# Altium PCB PCB1.PcbDoc (part 2 of 2)
Units mil, origin at the board's own origin, x right, y up, seen from the top; angles counter-clockwise.
Board outline 2312.99 x 1968.58 mil, 4 copper layers (Top Layer, MidLayer1, MidLayer2, Bottom Layer); 130 components, 134 nets, 621 pads, 156 vias.
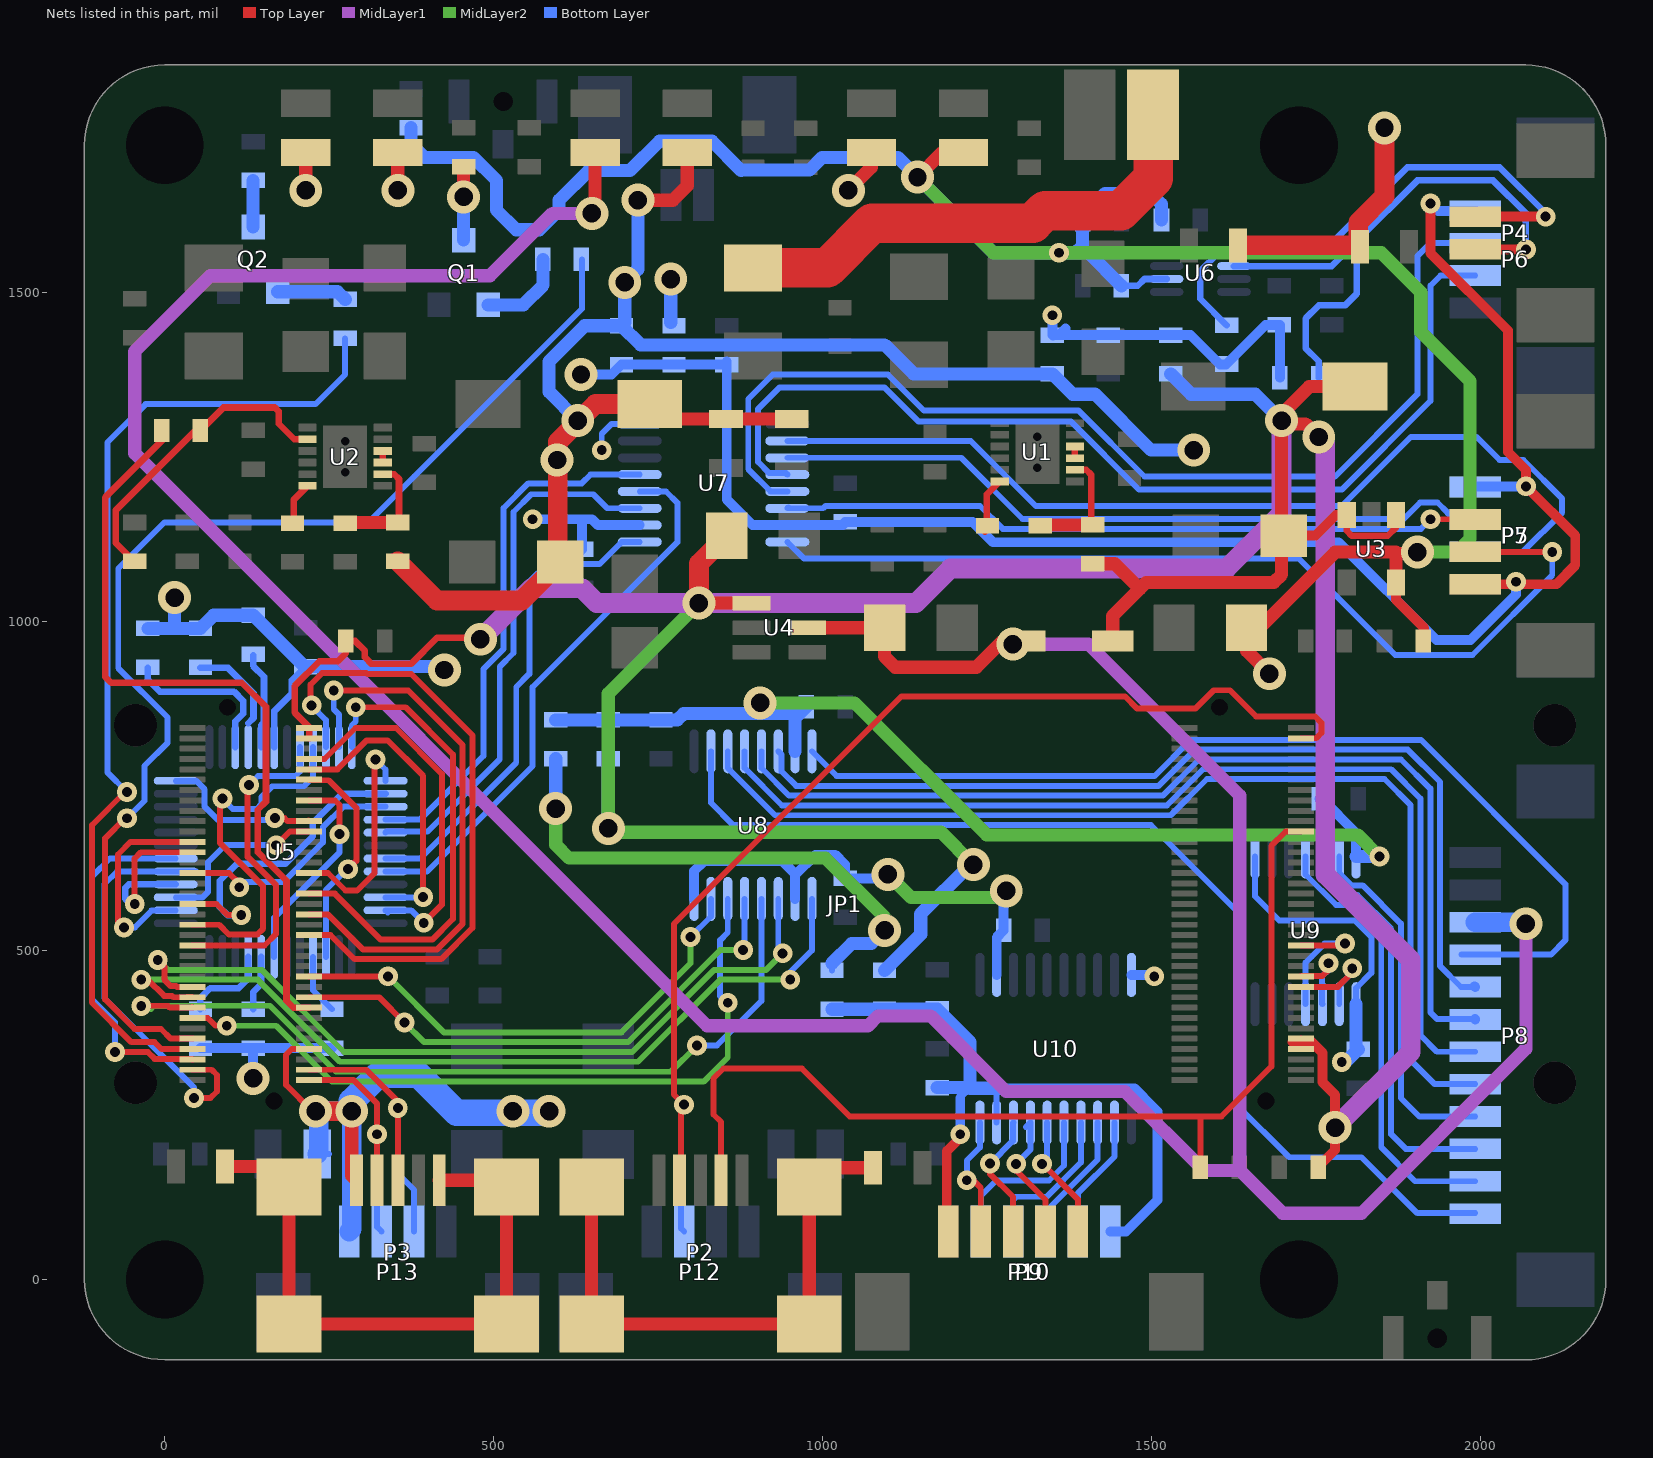
[diagram p4: the nets of this part, all layers, seen from the top]

## Via types
v1: diameter 50, hole 28, Top Layer to Bottom Layer, 78 vias
v2: diameter 30, hole 15, Top Layer to Bottom Layer, 78 vias

## Nets (pads, with @x,y where several pads share a name; then routed paths per layer and width w, separated by ;. In a path a pad name is that pad's centre, name@x,y a point inside that pad or via, vN(x,y) a via of type N, cw(c..) or ccw(c..) an arc to the next point about the centre after c; other vN are vias at no path point) (continued)
NetJP1_37: JP1.37 P2.2 P12.3 | length 1804.1
  Top Layer w9: P2.2@782.84,150.83 784.74,152.73 v2@784.74,265.83 ; v2(789.33,265.83) 773.93,281.23 773.93,540.42 1119.74,886.23 1460.07,886.23 1477.92,868.38 1567.21,868.38 1594.65,895.83 1619.33,895.83 1659.24,855.92 1748.79,855.92 1758.36,846.36 1758.36,830.73 1750.42,822.8 JP1.37@1727.24,822.8
  Bottom Layer w9: v2@784.74,261.23 784.74,77.86 P12.3@789.72,72.87
NetJP1_37_: JP1.37_ U5.29 | length 633.6
  Top Layer w9: JP1.37_@42.2,318.86 71.3,318.86 79.33,310.83 79.33,285.83 69.33,275.83 v2(44.33,275.83)
  Bottom Layer w9: v2(44.33,275.83) 44.33,292.16 -91.46,427.95 -91.46,601.22 -72.32,620.35 U5.29@16.73,620.35 U5.29@47.94,620.35
NetJP1_38_: JP1.38_ U5.30 | length 542.1
  Top Layer w9: v2(-75.67,345.83) -25.67,345.83 -15.26,335.42 41.39,335.42 JP1.38_@42.2,334.61
  Bottom Layer w9: v2(-75.67,345.83) -75.67,391.08 -110.16,425.57 -110.16,613.03 -83.15,640.04 U5.30@16.73,640.04
NetJP1_39_: JP1.39_ R30.2 | length 1528.5
  Top Layer w9: v2@-58.84,742.66 -110.67,690.83 -110.67,420.83 -50.67,360.83 -15.67,360.83 -5.2,350.35 JP1.39_@42.2,350.35
  Bottom Layer w9: v2(-57.32,741.14) -87.3,771.11 -87.3,1272.45 -29.02,1330.73 229.24,1330.73 274.33,1375.83 R30.2@274.33,1430.83
NetJP1_40_: JP1.40_ R27.2 | length 1827.5
  Top Layer w9: v2@-58.84,702.66 -90.67,670.83 -90.67,425.83 -45.67,380.83 -5.67,380.83 9.06,366.1 JP1.40_@42.2,366.1
  Bottom Layer w9: v2(-57.32,701.14) -30.67,727.8 -30.67,780.83 4.33,815.83 4.33,854.39 -70.67,929.39 -70.67,1080.83 -0.67,1150.83 309.33,1150.83 634.33,1475.83 R27.2@634.33,1550.83
NetJP1_42_: JP1.42_ U8.6 | length 1119.1
  Top Layer w9: JP1.42_@42.2,397.6 65.39,397.6 77.16,385.83 v2(94.33,385.83)
  MidLayer2 w9: v2(94.33,385.83) 169.33,385.83 254.33,300.83 819.33,300.83 855.95,337.44 v2(855.95,420.83)
  Bottom Layer w9: v2@854.33,420.83 844.33,430.83 844.33,515.83 855.95,527.44 U8.6@855.95,578.62
NetJP1_43_: JP1.43_ U8.4 | length 1266.9
  Top Layer w9: v2@-33.19,413.35 -30.3,416.23 4.85,416.23 7.74,413.35 JP1.43_@42.2,413.35 JP1.43_@41.39,414.16
  MidLayer2 w9: v2(-35.67,415.83) -31.07,411.23 -21.19,411.23 -16.19,416.23 160.01,416.23 260.41,315.83 769.33,315.83 v2(809.33,355.83)
  Bottom Layer w9: v2(809.33,355.83) 839.33,355.83 907.13,423.62 U8.4@907.13,578.62
NetJP1_44_: JP1.44_ U8.1 | length 1323.9
  Top Layer w9: v2(-35.67,455.83) -25.67,455.83 -0.98,431.14 11.03,431.14 13.07,429.09 JP1.44_@42.2,429.09 41.39,429.91 JP1.44_@34.07,429.91
  MidLayer2 w9: v2(-35.67,455.83) 141.49,455.83 266.3,331.02 719.52,331.02 844.33,455.83 v2(950.95,455.83)
  Bottom Layer w9: v2(950.95,455.83) 950.95,467.44 983.9,500.39 U8.1@983.9,578.62
NetJP1_45_: JP1.45_ U8.3 | length 1237.1
  Top Layer w9: v2(-10.67,485.83) -0.67,475.83 -0.67,455.83 9.11,446.04 17.2,446.04 18.4,444.84 JP1.45_@42.2,444.84
  MidLayer2 w9: v2(-10.67,485.83) 4.43,470.73 147.66,470.73 272.48,345.92 710.51,345.92 835.41,470.83 914.33,470.83 v2(939.33,495.83)
  Bottom Layer w9: U8.3@932.72,578.62 932.72,502.44 v2(939.33,495.83)
NetJP1_46: JP1.46 P2.4 R54.1 | length 1542.1
  Top Layer w9: P2.4@845.83,150.83 845.83,239.33 834.33,250.83 834.33,305.83 849.33,320.83 968.46,320.83 1041.42,247.87 1574.33,247.87 ; R54.1@1574.33,170.83 1574.33,247.87 ; JP1.46@1727.24,681.06 1704.06,681.06 1682.25,659.25 1682.25,323.74 1606.38,247.87 1574.33,247.87
NetJP1_49_: JP1.49_ U5.44 | length 502.7
  Top Layer w9: JP1.49_@42.2,507.83 151.77,507.83 169.37,525.43 169.37,599.25 126.09,642.53 126.09,749.87 v2(128.03,751.81)
  Bottom Layer w9: v2(128.03,751.81) 141.68,765.46 198.77,765.46 205.71,772.4 U5.44@205.71,809.33
NetJP1_51_: JP1.51_ U5.45 | length 561
  Top Layer w9: JP1.51_@42.2,539.33 82.64,539.33 97.52,524.45 140.83,524.45 149.69,533.31 149.69,597.86 83.74,663.8 83.74,728.19 86.69,731.14 v2(87.68,731.14)
  Bottom Layer w9: v2(87.68,731.14) 103.43,715.39 139.84,715.39 146.73,722.28 146.73,733.11 163.46,749.84 211.69,749.84 225.39,763.54 U5.45@225.39,809.33
NetJP1_53_: JP1.53_ U5.2 | length 477.3
  Top Layer w9: JP1.53_@42.2,570.83 78.7,570.83 95.55,553.98 v2(116.22,553.98)
  Bottom Layer w10: v2(116.22,553.98) 95.55,553.98 83.74,565.79 83.74,606.14 109.33,631.73 183.15,631.73 225.02,673.6 225.02,693.91 269.57,738.46 U5.2@335.63,738.46
NetJP1_56_: JP1.56_ U5.3 | length 370.2
  Top Layer w9: JP1.56_@42.2,618.07 97.4,618.07 113.27,602.2 v2(113.27,596.3)
  Bottom Layer w9: v2(113.27,596.3) 121.14,604.17 180.2,604.17 240.42,664.4 240.42,687.53 271.67,718.78 U5.3@335.63,718.78
NetJP1_57: JP1.57 U9.4 | length 203.5
  Top Layer w9: JP1.57@1727.24,507.83 1791.34,507.83 v2(1794.33,510.83)
  Bottom Layer w9: U9.4@1734.33,418.62 1734.33,481.76 1763.4,510.83 v2(1794.33,510.83)
NetJP1_58_: JP1.58_ U5.28 | length 274.2
  Top Layer w9: v2(-45.67,570.83) -45.67,640.12 -36.22,649.57 JP1.58_@42.2,649.57
  Bottom Layer w10: v2(-45.67,570.83) -52.2,570.83 -59.96,578.58 -59.96,595.32 -54.61,600.67 U5.28@16.73,600.67
NetJP1_59_: JP1.59_ U5.26 | length 325.9
  Top Layer w9: v2(-61.93,535.28) -71.07,544.42 -71.07,646.21 -51.97,665.32 JP1.59_@42.2,665.32
  Bottom Layer w9: v2(-61.93,535.28) -45.29,535.28 -20.26,560.3 -20.26,561.23 -20.2,561.3 U5.26@16.73,561.3
NetJP1_60: JP1.60 U9.3 | length 122.9
  Top Layer w9: JP1.60@1727.24,460.59 1728.06,461.41 1759.91,461.41 1769.33,470.83 v2(1769.33,480.83)
  Bottom Layer w9: U9.3@1759.92,418.62 1759.33,419.21 1759.33,460.83 1769.33,470.83 v2(1769.33,480.83)
NetJP1_61: JP1.61 U9.2 | length 155.9
  Top Layer w9: JP1.61@1727.24,444.84 1783.35,444.84 1805.24,466.73 v2(1805.24,472.99)
  Bottom Layer w9: U9.2@1785.51,418.62 1785.51,447.01 1805.24,466.73 v2(1805.24,472.99)
NetJP1__4: JP1._4 U5.11 | length 559.1
  Top Layer w9: JP1._4@219.37,791.3 242.75,791.3 289.88,838.43 351.46,838.43 421.34,768.54 421.34,569.72 v2(393.78,542.17)
  Bottom Layer w9: U5.11@339,557.93 U5.11@335.63,561.3 374.65,561.3 v2(393.78,542.17)
NetJP1__5: JP1._5 U5.10 | length 455.6
  Top Layer w9: JP1._5@219.37,775.55 262.76,775.55 306.93,819.72 338.66,819.72 392.8,765.59 v2(392.8,581.54)
  Bottom Layer w9: U5.10@335.63,580.98 392.24,580.98 v2(392.8,581.54)
NetJP1__6: JP1._6 U5.15 | length 336.4
  Top Layer w9: JP1._6@219.37,759.8 220.19,758.99 249.22,758.99 291.23,716.97 291.23,636.47 v2(278.62,623.86)
  Bottom Layer w9: U5.15@245.08,490.43 245.08,592.28 276.65,623.86 v2(278.62,623.86)
NetJP1__8: JP1._8 U5.19 | length 321.4
  Top Layer w9: JP1._8@219.37,728.31 258.82,728.31 265.83,721.3 v2(265.83,677.01)
  Bottom Layer w9: U5.19@166.34,490.43 166.34,549.96 265.83,649.45 v2(265.83,677.01)
NetJP1__10: JP1._10 U5.36 | length 247.4
  Top Layer w9: v2(167.4,701.61) 182.17,701.61 186.97,696.81 JP1._10@219.37,696.81 JP1._10@218.56,697.63
  Bottom Layer w9: U5.36@16.73,758.15 47.67,758.15 60.6,745.22 60.6,718.85 81.2,698.25 164.04,698.25 v2(167.4,701.61)
NetJP1__11: JP1._11 U5.27 | length 270.6
  Top Layer w9: v2(169.37,660.28) 190.16,681.06 JP1._11@219.37,681.06
  Bottom Layer w9: U5.27@16.73,580.98 57.6,580.98 66.02,589.41 66.02,634.69 91.61,660.28 v2(169.37,660.28)
NetJP1__15: JP1._15 U5.1 | length 338.2
  Top Layer w9: JP1._15@219.37,618.07 248.17,618.07 274.86,591.38 292.52,591.38 318.98,617.83 v2@318.98,790.59 ; v2@319.96,788.23 320.43,788.7 v2(320.43,790.59)
  Bottom Layer w9: v2@319.96,788.23 320.43,788.7 v2(320.43,790.59) 335.63,775.39 U5.1@335.63,758.15
NetJP1__17: JP1._17 U5.48 | length 751.1
  Top Layer w9: JP1._17@219.37,586.57 258.58,586.57 328.4,516.76 406.76,516.76 438.07,548.07 438.07,798.07 366.22,869.92 v2(290.43,869.92)
  Bottom Layer w9: U5.48@284.45,809.33 284.45,842.28 290.43,848.27 v2(290.43,869.92)
NetJP1__19: JP1._19 U5.47 | length 863.4
  Top Layer w9: JP1._19@219.37,555.08 247.99,555.08 301.22,501.85 414.08,501.85 452.98,540.75 452.98,812.69 370.16,895.51 v2(256.97,895.51)
  Bottom Layer w9: v2(256.97,895.51) 256.97,866.97 264.76,859.17 U5.47@264.76,809.33
NetJP1__21: JP1._21 U5.46 | length 974.3
  Top Layer w9: JP1._21@219.37,523.58 251.93,523.58 288.56,486.95 420.26,486.95 467.88,534.57 467.88,827.32 374.78,920.42 307.95,920.42 306.28,922.09 239.25,922.09 221.54,904.37 221.54,873.86 222.57,872.83 v2(223.33,872.83)
  Bottom Layer w9: v2(223.33,872.83) 223.33,872.06 245.08,850.32 U5.46@245.08,809.33
NetJP1__25: JP1._25 U8.7 | length 769.4
  Top Layer w9: JP1._25@219.37,460.59 339.09,460.59 v2(339.33,460.83)
  MidLayer2 w9: v2(339.33,460.83) 424.33,375.83 694.33,375.83 799.33,480.83 v2(799.33,520.83)
  Bottom Layer w9: v2(799.33,520.83) 830.35,551.85 U8.7@830.35,578.62
NetJP1__27: JP1._27 U8.5 | length 824
  Top Layer w9: JP1._27@219.37,429.09 326.06,429.09 v2(364.33,390.83)
  MidLayer2 w9: v2(364.33,390.83) 394.33,360.83 704.33,360.83 844.33,500.83 v2(879.33,500.83)
  Bottom Layer w9: v2@881.54,500.83 U8.5@881.54,578.62
NetJP1__28: JP1._28 R6.2 | length 1182.3
  Top Layer w10: R6.2@-4.72,1290.83 -4.72,1274.57 -90.67,1188.62 -90.67,916.38 -81.61,907.32 117.2,907.32 153.94,870.59 153.94,741.08 153.93,731.69 153.94,726.54 141.5,714.09 141.5,649.76 185.12,606.14 185.12,423.71 195.48,413.35 JP1._28@219.37,413.35
NetJP1__34: JP1._34 P3.3 P13.2 | length 473
  Top Layer w9: JP1._34@219.37,318.86 306.3,318.86 354.33,270.83 P3.3@354.33,150.83
  Bottom Layer w9: v2(354.33,260.83) 354.33,160.83 378.94,136.22 P13.2@378.94,72.87
NetJP1__35: JP1._35 P3.2 P13.3 | length 385.6
  Top Layer w9: JP1._35@219.37,303.11 287.12,303.11 322.84,267.39 v2(322.84,220.83) P3.2@322.84,150.83
  Bottom Layer w9: v2(322.84,220.83) 322.84,79.76 P13.3@329.72,72.87
NetL3_1: L3.1 P2.6 | length 857.2
  Top Layer w20: P2.6@648.98,140.98 P2.6@648.98,-67.68 P2.6@979.69,-67.68 P2.6@979.69,140.98 1008.54,169.84 L3.1@1076.93,169.84
NetL4_1: L4.1 P3.5 P3.6 | length 964.5
  Top Layer w9: P3.6@509.84,150.83 P3.6@519.69,140.98
  Top Layer w20: L4.1@91.73,171.81 158.15,171.81 P3.6@188.98,140.98 P3.6@188.98,-67.68 P3.6@519.69,-67.68 P3.6@519.69,140.98 ; P3.5@417.32,150.83 P3.6@509.84,150.83
NetP4_1: P4.1 R39.1 U6.6 | length 922
  Top Layer w15: P4.1@1992.28,1566.22 1992.68,1565.83 v2(2069.33,1565.83)
  Bottom Layer w10: U6.6@1625.51,1540.67 1774.17,1540.67 1811.83,1578.33 ; R39.1@1754.33,1370.83 1754.33,1395.83 1734.33,1415.83 1734.33,1460.83 1754.33,1480.83 1794.33,1480.83 1811.83,1498.33 1811.83,1578.33 ; v2(2069.33,1565.83) 2069.33,1620.83 2019.33,1670.83 1904.33,1670.83 1811.83,1578.33
NetP4_2: P4.2 R40.1 U6.5 | length 830.7
  Top Layer w15: P4.2@1992.28,1615.43 1992.68,1615.83 v2(2099.33,1615.83)
  Bottom Layer w10: R40.1@1614.33,1450.83 1574.33,1490.83 1574.33,1532.95 1602.21,1560.83 1625.04,1560.83 U6.5@1625.51,1560.35 1758.86,1560.35 1889.33,1690.83 2029.33,1690.83 2099.33,1620.83 v2(2099.33,1615.83)
NetP5_2: P5.2 U7.16 | length 1436.4
  Top Layer w9: P5.2@1992.28,1106.22 2108.94,1106.22 v2(2109.33,1105.83)
  Bottom Layer w9: U7.16@946.54,1121.26 971.97,1095.83 1724.33,1095.83 1870.64,949.52 1988.02,949.52 2109.33,1070.83 v2(2109.33,1105.83)
NetP5_3: P5.3 U7.14 | length 1069.9
  Top Layer w9: v2(1924.33,1155.83) 1991.89,1155.83 P5.3@1992.28,1155.43
  Bottom Layer w9: U7.14@948.08,1173.99 U7.14@946.54,1172.44 1000.95,1172.44 1004.33,1175.83 1239.33,1175.83 1273.93,1141.23 1909.74,1141.23 v2(1924.33,1155.83)
NetP6_2: P6.2 U7.13 | length 1634.8
  Bottom Layer w9: U7.13@946.54,1198.03 921.09,1198.03 887.13,1232 887.13,1338.62 924.33,1375.83 1099.33,1375.83 1154.33,1320.83 1389.33,1320.83 1489.33,1220.83 1727.87,1220.83 1779.33,1220.83 1904.33,1345.83 1904.33,1555.83 1923.94,1575.43 P6.2@1992.28,1575.43
NetP6_3: P6.3 U7.12 | length 1538.4
  Bottom Layer w9: U7.12@946.54,1223.62 944.33,1225.83 918.89,1225.83 902.03,1242.68 902.03,1323.53 934.33,1355.83 1094.33,1355.83 1145.62,1304.54 1377.32,1304.54 1481.03,1200.83 1789.33,1200.83 1924.33,1335.83 1924.33,1510.83 1939.72,1526.22 P6.3@1992.28,1526.22
NetP7_2: P7.2 U7.11 | length 1105.9
  Bottom Layer w9: U7.11@946.54,1249.21 1210.95,1249.21 1304.02,1156.14 1883.49,1156.14 1908.59,1181.23 1934.85,1181.23 1949.74,1166.35 1949.74,1165.49 1959.79,1155.43 P7.2@1992.28,1155.43
NetP7_3: P7.3 U7.10 | length 1479.1
  Bottom Layer w9: U7.10@946.54,1274.8 1225.35,1274.8 1324.33,1175.83 1789.33,1175.83 1894.33,1280.83 1994.33,1280.83 2029.33,1245.83 2065.58,1245.83 2124.33,1187.08 2124.33,1165.83 2064.72,1106.22 P7.3@1992.28,1106.22
NetP8_4: P8.4 U8.16 | length 1526.6
  Bottom Layer w9: U8.16@983.9,803.03 1021.51,765.42 1504.85,765.42 1559.88,820.45 1909.78,820.45 2129.33,600.9 2129.33,515.83 2107.36,493.86 P8.4@1992.28,493.86 P8.4@1971.66,493.86
NetP8_5: P8.5 U8.14 | length 1434.2
  Bottom Layer w9: U8.14@932.72,803.03 937.9,797.85 937.9,772.4 959.79,750.52 1511.03,750.52 1566.06,805.54 1889.61,805.54 1938.86,756.3 1938.86,476.3 1970.51,444.65 P8.5@1992.28,444.65
  Bottom Layer w15: P8.5@1991.1,445.83 P8.5@1992.28,444.65
NetP8_6: P8.6 U8.13 | length 1513.6
  Bottom Layer w9: U8.13@907.13,803.03 907.13,777.59 949.1,735.61 1517.2,735.61 1572.23,790.64 1879.52,790.64 1923.95,746.2 1923.95,406.2 1934.33,395.83 P8.6@1991.89,395.83
  Bottom Layer w15: P8.6@1991.89,395.83 P8.6@1992.28,395.43
NetP8_7: P8.7 U8.12 | length 1571.3
  Bottom Layer w9: U8.12@881.54,803.03 881.54,777.59 938.42,720.7 1523.38,720.7 1578.4,775.73 1864.43,775.73 1909.05,731.11 1909.05,371.11 1933.94,346.22 P8.7@1992.28,346.22
NetP8_8: P8.8 U8.11 | length 1633.5
  Bottom Layer w9: U8.11@855.95,803.03 855.95,777.59 927.73,705.8 1529.55,705.8 1584.58,760.83 1854.33,760.83 1894.14,721.02 1894.14,333.38 1930.51,297.01 P8.8@1992.28,297.01
NetP8_9: P8.9 U9.13 | length 540.6
  Bottom Layer w9: U9.13@1785.51,643.03 1785.51,617.59 1803.94,599.16 1821,599.16 1879.24,540.92 1879.24,275.92 1907.36,247.8 P8.9@1992.28,247.8
NetP8_10: P8.10 U9.12 | length 614.2
  Bottom Layer w9: U9.12@1759.92,643.03 1759.92,617.59 1793.25,584.26 1813.06,584.26 1864.33,532.99 1864.33,220.83 1886.58,198.58 P8.10@1992.28,198.58
NetP8_11: P8.11 U9.11 | length 669.4
  Bottom Layer w9: U9.11@1734.33,643.03 1734.33,615.83 1780.81,569.35 1806.89,569.35 1849.33,526.91 1849.33,200.83 1900.79,149.37 P8.11@1992.28,149.37
NetP8_12: P8.12 U8.10 | length 1671.5
  Bottom Layer w9: U8.10@830.35,803.03 830.35,724.8 864.33,690.83 1499.33,690.83 1629.33,560.83 1629.33,265.76 1709.26,185.83 1819.33,185.83 1904.33,100.83 P8.12@1992.28,100.83
NetP9_2: P9.2 U10.20 | length 188.6
  Top Layer w9: v2(1219.33,150.83) 1229.33,150.83 1240.51,139.65 P9.2@1240.51,72.87
  Bottom Layer w9: v2(1219.33,150.83) 1219.33,180.83 1239.17,200.67 U10.20@1239.17,238.62
NetP9_3: P9.3 U10.18 | length 195.3
  Top Layer w9: v2(1254.72,176.22) 1254.33,175.83 1254.33,160.83 1289.72,125.43 P9.3@1289.72,72.87
  Bottom Layer w9: v2(1254.72,176.22) 1289.33,210.83 1289.33,237.6 U10.18@1290.35,238.62
NetP9_4: P9.4 U10.17 | length 203.1
  Top Layer w9: v2(1294.33,175.83) 1294.33,165.83 1338.94,121.22 P9.4@1338.94,72.87
  Bottom Layer w9: v2(1294.33,175.83) 1315.95,197.44 U10.17@1315.95,238.62 1308.93,231.6
NetP9_5: P9.5 U10.16 | length 192.3
  Top Layer w9: v2(1333.71,175.83) 1334.33,175.83 1388.15,122.01 P9.5@1388.15,72.87
  Bottom Layer w9: v2(1333.71,175.83) 1334.33,175.83 1341.54,183.03 U10.16@1341.54,238.62
NetP10_2: P10.2 U10.12 | length 214.3
  Bottom Layer w9: P10.2@1388.15,72.87 1388.15,131.1 1443.9,186.85 U10.12@1443.9,238.62 U10.12@1443.9,213.18
NetP10_3: P10.3 U10.13 | length 198.6
  Bottom Layer w9: P10.3@1338.94,72.87 1338.94,102.97 1418.31,182.34 U10.13@1418.31,238.62
NetP10_4: P10.4 U10.14 | length 235.6
  Bottom Layer w9: P10.4@1289.72,72.87 1289.72,121.22 1294.33,125.83 1340.72,125.83 1392.72,177.83 U10.14@1392.72,238.62
NetP10_5: P10.5 U10.15 | length 265.2
  Bottom Layer w9: P10.5@1240.51,72.87 1240.51,127.01 1263.93,150.42 1344.23,150.42 1367.13,173.32 U10.15@1367.13,238.62
NetQ1_1: Q1.1 R27.1 | length 135.1
  Bottom Layer w20: Q1.1@491.73,1481.61 545.12,1481.61 575.28,1511.77 R27.1@575.28,1550.83
NetQ1_3: Q1.3 R26.2 | length 110.8
  Top Layer w20: v1(454.33,1645.83) R26.2@454.33,1690.83
  Bottom Layer w20: Q1.3@454.33,1580.04 v1(454.33,1645.83)
NetQ2_1: Q2.1 R30.1 | length 107.5
  Bottom Layer w20: Q2.1@171.73,1501.61 262.6,1501.61 R30.1@274.33,1489.88
NetQ2_3: Q2.3 R28.2 | length 70.8
  Bottom Layer w20: Q2.3@134.33,1600.04 R28.2@134.33,1670.83
NetR1_1: R1.1 R3.2 U1.8 | length 190.6
  Top Layer w10: R3.2@1326.54,1142.24 R3.2@1331.46,1147.17 ; U1.8@1383.62,1230.95 1401.01,1230.95 1408.31,1223.65 1408.31,1147.17 R1.1@1410.87,1147.17
  Top Layer w20: R3.2@1331.46,1147.17 R1.1@1408.31,1147.17
NetR4_2: R4.2 U1.6 | length 86.1
  Top Layer w10: R4.2@1246.54,1136.57 1249.88,1139.92 1249.88,1193.66 U1.6@1269.45,1213.23
NetR6_1: R6.1 R7.2 U2.2 | length 468.3
  Top Layer w10: R7.2@-45.67,1090.83 -74.76,1119.92 -74.76,1169.09 R6.1@45.24,1289.09 ; R6.1@54.33,1290.83 89.13,1325.63 167.4,1325.63 173.31,1319.72 173.31,1301.02 196.93,1277.4 U2.2@217.24,1277.4
NetR8_1: R8.1 R10.2 U2.8 | length 173.6
  Top Layer w10: U2.8@331.42,1224.25 348.81,1224.25 356.1,1216.96 356.1,1152.6 R8.1@354.33,1150.83
  Top Layer w20: R10.2@275.28,1150.83 R8.1@354.33,1150.83
NetR11_2: R11.2 U2.6 | length 66.1
  Top Layer w10: R11.2@194.33,1149.88 195.95,1151.5 195.95,1185.24 U2.6@217.24,1206.54
NetR20_1: R20.1 U5.39 | length 251.4
  Bottom Layer w10: R20.1@-25.67,929.83 -25.67,911.83 -7.58,893.74 85.54,893.74 105.17,893.74 119.06,879.86 119.06,860.22 107.28,848.45 U5.39@107.28,809.33
NetR21_1: R21.1 U5.41 | length 148.1
  Bottom Layer w10: R21.1@134.33,948.83 134.33,932.9 150.87,916.36 150.87,847.05 146.65,842.83 U5.41@146.65,809.33
NetR22_1: R22.1 U5.40 | length 145.5
  Bottom Layer w10: R22.1@54.33,929.83 96.33,929.83 134.96,891.2 134.96,853.63 126.97,845.64
NetR23_1: R23.1 U5.20 | length 84.7
  Bottom Layer w10: R23.1@134.33,410.83 134.33,436.83 146.65,449.15 U5.20@146.65,490.43
NetR24_1: R24.1 U5.21 | length 134.7
  Bottom Layer w10: R24.1@54.21,411.26 54.21,427.99 68.98,442.76 112.28,442.76 126.97,457.44 U5.21@126.97,490.43
NetR25_1: R25.1 U5.16 | length 91.6
  Bottom Layer w9: U5.16@225.39,490.43 225.39,439.76 R25.1@254.33,410.83
NetU1_9: U1.9 U1.10 | length 17.7
  Top Layer w10: U1.9@1383.62,1248.66 U1.10@1383.62,1266.38
NetU2_9: U2.9 U2.10 | length 17.7
  Top Layer w10: U2.9@331.42,1241.97 U2.10@331.42,1259.69
NetU5_4: U5.4 U7.5 | length 806.5
  Bottom Layer w9: U5.4@335.63,699.09 387.6,699.09 484.33,795.83 484.33,927.78 515.28,958.72 515.28,1172.85 552.84,1210.41 633.92,1210.41 647.13,1223.62 U7.5@722.13,1223.62
NetU5_5: U5.5 U7.3 | length 816.3
  Bottom Layer w9: U5.5@335.63,679.41 337.05,680.83 399.33,680.83 509.33,790.83 509.33,931.7 530.18,952.55 530.18,1166.68 557.24,1193.73 651.43,1193.73 672.72,1172.44 U7.3@722.13,1172.44
NetU5_7: U5.7 U7.1 | length 735.2
  Bottom Layer w9: U5.7@335.63,640.04 388.54,640.04 534.33,785.83 534.33,900.83 554.33,920.83 554.33,1060.83 581.17,1087.67 661.17,1087.67 694.76,1121.26 U7.1@722.13,1121.26
NetU5_8: U5.8 U7.4 | length 845.6
  Bottom Layer w9: U5.8@335.63,620.35 398.86,620.35 559.24,780.73 559.24,885.73 559.24,900.73 779.33,1120.83 779.33,1180.83 762.13,1198.03 U7.4@722.13,1198.03
VBATT: D2.1 P11.1 | length 830.2
  Top Layer w9: P11.1@1502.56,1737.6 P11.1@1502.56,1770.83 P11.1@1532.56,1800.83
  Top Layer w60: D2.1@901.26,1537.76 1007.39,1537.76 1075.46,1605.83 1319.33,1605.83 1338.43,1624.92 1453.43,1624.92 1502.56,1674.06 P11.1@1502.56,1770.83
VCC_1V8: C22.2 C23.2 C25.2 C28.1 C30.2 C31.2 C32.2 C33.2 D11.1 R20.2 R21.2 R22.2 R23.2 R24.2 R25.2 R31.1 R36.2 R37.2 U3.5 U5.42 U6.2 U7.2 U7.8 U8.2 U8.8 U9.1 U9.8 U10.2 U10.10 | length 6142.5
  Top Layer w15: C23.2@1644.57,990.83 C23.2@1664.33,990.83 ; U3.5@1871.73,1059.65 1871.73,1033.43 1914.33,990.83 C22.2@1914.33,971.77 ; 1871.73,1105.83 v1(1904.33,1105.83)
  Top Layer w20: v1(1144.33,1675.83) 1181.93,1713.43 D11.1@1214.33,1713.43 ; C23.2@1644.57,990.83 1644.57,955.59 v1(1679.33,920.83) ; C23.2@1664.33,990.83 1779.33,1105.83 1871.73,1105.83 U3.5@1871.73,1059.65
  MidLayer2 w20: v1(1099.33,615.83) 1134.33,580.83 1269.33,580.83 v1(1279.33,590.83) ; v1(1144.33,1675.83) 1259.33,1560.83 1849.33,1560.83 1909.33,1500.83 1909.33,1440.83 1984.33,1365.83 1984.33,1125.83 1964.33,1105.83 v1(1904.33,1105.83)
  Bottom Layer w9: v2(664.33,1260.83) 664.33,1285.83 678.9,1300.39 U7.8@722.13,1300.39 ; U9.8@1657.56,643.03 1657.56,582.6 1694.33,545.83 1809.33,545.83 1834.33,520.83 1834.33,466.16 1811.1,442.93 U9.1@1811.1,418.62 ; C30.2@1811.1,353.11 C30.2@1814.33,349.88
  Bottom Layer w10: 14.33,989.88 15.09,990.64 ; U5.42@166.34,809.33 166.77,809.76 166.77,864.21 193.33,890.77 193.33,910.83 C25.2@213.33,930.83 ; C25.2@214.33,929.88 C25.2@214.33,931.77 ; C28.1@1454.33,1510.83 1479.33,1510.83 1489.49,1520.98 U6.2@1523.15,1520.98
  Bottom Layer w15: R24.2@54.33,351.77 R23.2@134.33,351.77 ; v1(134.33,305.83) 144.37,295.79 144.37,295.11 144.1,295.11 134.33,304.88 R23.2@134.33,351.77 ; R25.2@254.33,351.77 R23.2@134.33,351.77 ; v2(559.33,1155.83) 634.33,1155.83 ; C31.2@634.33,1109.88 634.33,1155.83 ; U7.2@722.13,1146.85 658.31,1146.85 649.33,1155.83 634.33,1155.83 ; U8.8@804.76,578.62 804.76,621.26 819.33,635.83 939.33,635.83 958.31,616.85 958.31,614.8 ; U8.2@958.31,578.62 958.31,614.8 ; v1@1093.39,609.88 C32.2@1034.33,609.88 1034.33,630.83 1019.33,645.83 989.33,645.83 958.31,614.8 ; U10.2@1264.76,463.03 1264.76,520.32 C33.2@1275.28,530.83 v1@1275.28,590.83 ; U10.10@1469.49,463.03 v2@1502.13,463.03
  Bottom Layer w20: R20.2@-25.67,989.88 14.33,989.88 R22.2@54.33,989.88 74.33,1009.88 R21.2@134.33,1009.88 C25.2@214.33,929.88 ; 15.09,990.64 v1(15.09,1036.54) ; C25.2@214.33,931.77 419.85,931.77 v1(425.09,926.54) ; R31.1@374.33,1750.83 374.33,1725.83 394.33,1705.83 469.33,1705.83 504.33,1670.83 504.33,1625.83 534.33,1595.83 569.33,1595.83 599.33,1625.83 599.33,1640.83 644.33,1685.83 707.22,1685.83 752.22,1730.83 831.48,1730.83 876.48,1685.83 877.39,1686.73 980.24,1686.73 999.33,1705.83 1114.33,1705.83 v1(1144.33,1675.83) 1259.33,1560.83 v2(1359.33,1560.83) 1384.33,1560.83 ; C28.1@1454.33,1510.83 1404.33,1560.83 1384.33,1560.83 ; R37.2@1515.28,1610.83 1515.28,1634.88 1499.33,1650.83 1470,1650.83 1429.33,1650.83 1395.28,1616.77 R36.2@1395.28,1610.83 1395.28,1571.77 1384.33,1560.83 ; v2@1789.33,330.83 1795.28,330.83 C30.2@1814.33,349.88 ; C30.2@1811.1,353.11 U9.1@1811.1,418.62
  other v2: 1789.24,330.83 1504.33,460.83
VCC_3V3: C1.2 C2.2 C6.1 C7.1 C20.1 D1.1 D3.1 D10.1 D12.1 D13.1 JP1.66 JP1.67 JP1._1 JP1._2 L1.2 R1.2 R34.1 R42.1 R45.1 R51.1 U3.1 U3.3 U4.1 | length 6717.1
  Top Layer w9: JP1.67@1727.24,350.35 JP1.66@1727.24,366.1
  Top Layer w10: JP1._2@219.37,822.8 JP1._1@219.37,838.54 219.37,840.15 197.43,862.1 197.43,902.05 235.15,939.77 263.28,939.77 275.28,951.77 C1.2@275.28,970.83 289.33,970.83 304.33,955.83 304.33,945.83 314.33,935.83 374.38,935.83 414.38,975.83 v1@479.87,975.83 ; U4.1@891.85,1028.39 U4.1@892.01,1028.23 ; U3.3@1796.93,1162.01 1796.93,1138.23 1804.33,1130.83 1859.33,1130.83 1871.73,1143.23 U3.1@1871.73,1162.01
  Top Layer w15: D1.1@1701.26,1130.83 1749.33,1130.83 1780.51,1162.01 U3.3@1796.93,1162.01 ; 1714.33,360.83 1744.33,360.83 1760.34,344.82 1760.34,299.82 1779.33,280.83 1779.33,196.77 C2.2@1753.39,170.83
  Top Layer w20: v1(214.33,1655.83) D13.1@214.33,1713.43 ; v1(354.33,1655.83) D12.1@354.33,1713.43 ; v1(812.09,1028.39) U4.1@891.85,1028.39 ; v1(1039.33,1655.83) 1074.33,1690.83 D3.1@1074.33,1713.43 ; R1.2@1410.87,1088.11 1444.29,1088.11 1482.36,1050.04 ; D10.1@1441.26,970.83 1441.26,1008.94 1482.36,1050.04 ; v1(1754.33,1280.83) 1734.33,1300.83 v1@1697.8,1300.83 ; L1.2@1809.57,1357.52 1739.65,1357.52 1697.8,1315.67 v1(1697.8,1305.83) v1@1697.8,1300.83 ; 1482.36,1050.04 1492.15,1059.83 1686.05,1059.83 1697.8,1071.57 v1@1697.8,1300.83
  Top Layer w30: v1(812.09,1028.39) 812.09,1088.58 C20.1@854.33,1130.83 ; C6.1@1639.33,1571.81 1639.96,1572.44 1814.33,1572.44 1814.33,1607.04 1854.28,1646.99 v1(1854.28,1750.78)
  MidLayer1 w30: v1(479.87,973.39) 557.31,1050.83 634.33,1050.83 656.77,1028.39 v1(812.09,1028.39) 1141.89,1028.39 1194.33,1080.83 1614.33,1080.83 1697.8,1164.29 v1(1697.8,1305.83) ; v1(1754.33,1280.83) 1764.33,1270.83 1764.33,615.83 1894.33,485.83 1894.33,345.83 v1(1779.33,230.83)
  MidLayer2 w20: v1(674.33,685.83) 674.33,890.63 v1(812.09,1028.39) ; v1@680.24,679.92 1180.24,679.92 v1(1229.33,630.83)
  Bottom Layer w20: v1(674.33,685.83) R45.1@674.33,791.77 ; R42.1@769.33,1454.88 v1(769.33,1520.83) ; R51.1@1094.33,469.88 1149.33,524.88 1149.33,555.83 1224.33,630.83 v1(1229.33,630.83) ; R34.1@1529.33,1376.77 1560.28,1345.83 1657.8,1345.83 v1(1697.8,1305.83)
VCC_5V: C13.1 C14.1 D6.1 D7.1 D15.1 JP1._32 L2.2 P3.1 P13.4 R8.2 R33.1 R41.1 R44.1 R50.1 | length 4167.2
  Top Layer w9: JP1._32@219.37,350.35 193.11,350.35 184.25,341.5 184.25,295.91 224.33,255.83 v1(229.33,255.83) v1@234.33,255.83
  Top Layer w20: v1(284.33,255.83) 284.33,157.83 P3.1@291.34,150.83 ; v1(719.33,1640.83) 772.43,1640.83 794.33,1662.73 D7.1@794.33,1713.43 ; L2.2@737.36,1330.83 759.96,1308.23 C13.1@853.35,1308.23 C14.1@953.35,1308.23
  Top Layer w30: v1@234.33,255.83 v1(284.33,255.83) ; R8.2@354.33,1091.77 413.78,1032.32 542.76,1032.32 D6.1@597.52,1087.09 ; D6.1@601.26,1090.83 D6.1@597.52,1087.09 ; L2.2@717.36,1330.83 654.88,1330.83 597.52,1273.46 D6.1@597.52,1087.09
  MidLayer2 w20: v1(594.33,715.83) 594.33,660.83 614.33,640.83 1004.33,640.83 1094.33,550.83 v1(1094.33,530.83)
  Bottom Layer w9: D15.1@231.73,190.83 D15.1@250.01,190.83 ; R41.1@694.33,1449.88 R41.1@699.33,1454.88 ; R50.1@1014.33,469.88 R50.1@1014.33,480.83
  Bottom Layer w20: v1(594.33,715.83) R44.1@594.33,791.77 ; v1(627.8,1305.83) 584.33,1349.29 584.33,1395.83 638.39,1449.88 R41.1@694.33,1449.88 723.39,1420.83 1094.33,1420.83 1138.39,1376.77 R33.1@1349.33,1376.77 1380.28,1345.83 1414.33,1345.83 1499.33,1260.83 v1(1564.33,1260.83) ; R41.1@699.33,1454.88 v1(699.33,1515.83) 719.33,1535.83 v1(719.33,1640.83) ; R50.1@1014.33,480.83 1044.33,510.83 1074.33,510.83 v1(1094.33,530.83)
  Bottom Layer w30: D15.1@231.73,190.83 234.33,193.43 234.33,255.83 v1(284.33,255.83) ; P13.4@280.51,72.87 284.33,76.69 v1(284.33,255.83) ; v1@284.33,270.83 v1(284.33,255.83)
  Bottom Layer w40: v1@284.33,270.83 324.33,310.83 386.32,310.83 443.72,253.43 v1@584.33,253.43
  other v1: 529.33,255.83 584.33,255.83 596.41,1245.82
VCC_6V5: C24.1 D10.2 D16.1 P8.3 U4.5 | length 5417.2
  Top Layer w20: v1(649.33,1620.83) 654.33,1625.83 D16.1@654.33,1713.43 ; U4.5@976.65,990.83 C24.1@1094.33,990.83 1094.33,946.93 1110.43,930.83 1233.99,930.83 1273.99,970.83 D10.2@1307.4,970.83
  MidLayer1 w20: v1(649.33,1620.83) 589.33,1620.83 494.33,1525.83 69.33,1525.83 -45.67,1410.83 -45.67,1255.83 824.33,385.83 1069.33,385.83 1084.33,400.83 1164.33,400.83 1279.33,285.83 1459.33,285.83 1579.33,165.83 1634.33,165.83 ; v1(1289.33,965.83) 1404.33,965.83 1634.33,735.83 1634.33,165.83 ; v1(2069.33,540.83) 2069.33,350.83 1819.33,100.83 1699.33,100.83 1634.33,165.83
  Bottom Layer w20: v1@2067.09,543.07 v1(2069.33,540.83)
  Bottom Layer w30: P8.3@1992.28,543.07 v1@2067.09,543.07
VCC_I2C: R33.2 R34.2 R35.2 R38.2 R39.2 R40.2 | length 514.8
  Bottom Layer w15: v2(1349.33,1465.83) R33.2@1349.33,1435.83 ; R33.2@1350.28,1434.88 R33.2@1349.33,1435.83 ; 1369.42,1445.74 R33.2@1359.5,1435.83 ; R39.2@1695.28,1370.83 1695.28,1450.83 1673.39,1450.83 1613.39,1390.83 1604.33,1390.83 1559.33,1435.83 R34.2@1529.33,1435.83 R35.2@1434.33,1435.83 R33.2@1359.5,1435.83 ; R33.2@1349.33,1435.83 R33.2@1359.5,1435.83
VCC_IO: C34.2 P9.1 P10.1 R50.2 R51.2 R52.2 U10.19 | length 1190.3
  Top Layer w9: P9.1@1188.93,75.25 P9.1@1191.3,72.87 ; 1188.93,195.42 1191.3,197.8
  Top Layer w15: P9.1@1188.93,75.25 1188.93,195.42 ; 1191.3,197.8 v2@1211.83,218.33
  Bottom Layer w9: 1209.33,275.83 1224.33,290.83 1223.39,291.77 ; U10.19@1264.76,270.39 U10.19@1264.76,238.62 1264.76,286.26
  Bottom Layer w15: v2(1209.33,220.83) 1209.33,275.83 ; 1264.76,286.26 1269.33,290.83 1474.16,290.83 1504.16,260.83 1509.33,255.66 1509.33,120.83 1461.38,72.87 P10.1@1437.36,72.87
  Bottom Layer w20: R50.2@1014.33,410.83 R51.2@1094.33,410.83 1174.33,410.83 1224.33,360.83 1224.33,290.83 1264.33,290.83 ; C34.2@1174.33,291.77 1223.39,291.77
VCC_SPI: C35.2 C36.2 R44.2 R45.2 R46.2 U8.15 U9.14 | length 1659
  MidLayer2 w20: v1(905.09,876.54) 1048.62,876.54 1249.33,675.83 1813.74,675.83 v2(1846.54,643.03)
  Bottom Layer w15: C36.2@1755.28,730.83 1759.33,730.83 1811.1,679.06 U9.14@1811.1,643.03
  Bottom Layer w20: R44.2@594.33,850.83 R45.2@674.33,850.83 R46.2@754.33,850.83 779.33,850.83 788.86,860.35 v1@921.27,860.35 ; v1(905.09,876.54) v1@921.27,860.35 ; U8.15@958.31,803.03 958.31,853.86 C35.2@964.8,860.35 ; C35.2@975.28,870.83 C35.2@964.8,860.35 ; U9.14@1811.1,643.03 v2(1846.54,643.03) ; v1@921.27,860.35 C35.2@964.8,860.35
VCC_UART: C37.2 P5.1 P6.1 P7.1 R41.2 R42.2 R43.2 U7.15 | length 2738.6
  Top Layer w15: v2(1924.33,1635.83) 1924.33,1560.1 2041.87,1442.56 2041.87,1258.15 2069.33,1230.69 v2(2069.33,1205.83) 2144.33,1130.83 2144.33,1085.83 2115.51,1057.01 P5.1@1992.28,1057.01
  Bottom Layer w9: C37.2@1031.3,1146.85 C37.2@1034.33,1149.88 ; P7.1@1992.28,1204.65 P7.1@1993.46,1205.83
  Bottom Layer w15: v1(632.8,1375.83) 679.33,1375.83 R41.2@694.33,1390.83 R42.2@774.33,1390.83 R43.2@854.33,1390.83 ; R43.2@854.33,1395.83 R43.2@854.33,1390.83 ; C37.2@1031.3,1146.85 U7.15@946.54,1146.85 893.31,1146.85 854.33,1185.83 R43.2@854.33,1390.83 ; C37.2@1034.33,1151.77 1228.39,1151.77 1259.33,1120.83 1784.55,1120.83 1933.42,971.95 1985.13,971.95 2054.33,1041.15 v2(2054.33,1060.83) ; v2(1924.33,1635.83) 1935.51,1624.65 P6.1@1992.28,1624.65 P6.1@1996.1,1620.83 ; P7.1@1993.46,1205.83 v2(2069.33,1205.83)
pads on no net: "P1. " "P4. " "P5. " "P6. " "P7. " "P8. " "P9. " "P10. " "P12. " "P13. " JP1.8 JP1.9 JP1.11 JP1.12 JP1.14 JP1.15 JP1.16 JP1.17 JP1.18 JP1.19 JP1.20 JP1.21 JP1.23 JP1.24 JP1.25 JP1.27 JP1.28 JP1.30 JP1.32 JP1.34 JP1.35 JP1.36_ JP1.38 JP1.39 JP1.40 JP1.41 JP1.41_ JP1.42 JP1.43 JP1.44 JP1.45 JP1.46_ JP1.47 JP1.47_ JP1.48 JP1.48_ JP1.49 JP1.50_ JP1.51 JP1.52 JP1.52_ JP1.53 JP1.54_ JP1.55 JP1.55_ JP1.57_ JP1.58 JP1.59 JP1.60_ JP1.61_ JP1.62 JP1.62_ JP1.63 JP1.63_ JP1.64 JP1.64_ JP1.65 JP1.65_ JP1.66_ JP1.67_ JP1.68 JP1.68_ JP1.69 JP1.69_ JP1.70_ JP1._7 JP1._9 JP1._12 JP1._13 JP1._14 JP1._16 JP1._18 JP1._20 JP1._22 JP1._23 JP1._24 JP1._26 JP1._29 JP1._30 JP1._31 JP1.A JP1.B JP1.E JP1.F JP1.G JP1.H P1. P4. P5. P6. P7. P8. P9. P10. P12. P13. SW1.0 SW2.0 U1.2 U1.4 U1.7 U2.4 U2.7 U5.6 U5.9 U5.12 U5.18 U5.22 U5.23 U5.24 U5.25 U5.31 U5.32 U5.33 U5.34 U5.35 U5.37 U5.38 U5.43 U9.5 U9.6 U9.9 U9.10

## Polygon pours and split planes (outlines as drawn)
GND on Top Layer "GND" (solid, remove dead copper, pour order 1011): -0.67,1845 -120.67,1723.8 -120.67,915.83 2189.33,915.83 2189.33,1723.8 2069.33,1845 -0.67,1845
VCC_1V8 on Top Layer "VCC_1V8" (solid, remove dead copper, pour order 1008): 1614.33,955.83 1659.11,955.83 1735.88,895.83 2017.35,895.83 2049.33,920.83 2049.33,1250.83 2049.33,1255.83 2010.95,1285.83 1614.33,975.83 1614.33,955.83
VCC_3V3 on Top Layer "VCC_3V3" (solid, remove dead copper, pour order 1015): 1609.33,1610.83 1844.33,1610.83 1854.33,1600.83 1944.33,1510.83 1944.33,885.83 1944.33,235.83 1824.33,115.83 1799.33,90.83 1524.33,90.83 1524.33,220.83 1424.33,320.83 1419.33,325.83 1419.33,1535.83 1419.33,1545.83 1479.33,1605.83 1484.33,1610.83 1609.33,1610.83
VCC_5V on Top Layer "VCC_5V" (solid, remove dead copper, pour order 1007): 994.33,1310.83 989.33,1315.83 989.33,1335.83 984.33,1335.83 969.33,1350.83 824.33,1350.83 794.33,1380.83 789.33,1385.83 789.33,1470.83 779.33,1470.83 764.33,1485.83 759.33,1480.83 504.33,1480.83 504.33,950.83 434.33,880.83 424.33,870.83 424.33,195.83 724.33,195.83 729.33,200.83 729.33,565.83 729.33,1133.66 794.33,1198.66 801.5,1205.83 959.33,1205.83 974.33,1205.83 994.33,1225.83 994.33,1310.83
NetC5_1 on Top Layer "C5_1" (solid, remove dead copper, pour order 1009): 1393.78,1446.69 1394.8,1445.7 1394.8,1301.95 1415.32,1301.95 1440.39,1277.52 1510.74,1277.52 1568.98,1334.27 1568.98,1409.63 1530.94,1446.69 1393.78,1446.69
NetC5_2 on Top Layer "Top Layer-No Net" (solid, remove dead copper, pour order 1012): 1383.62,1284.09 1407.76,1284.09 1407.76,1281.14 1457.76,1231.14 1458.74,1230.16 1512.87,1230.16 1512.87,1190.79 1515.83,1187.83 1519.76,1183.9 1547.32,1183.9 1584.72,1183.9 1586.69,1181.93 1599.49,1169.13 1599.49,1091.38 1600.47,1090.39 1590.63,1080.55 1482.36,1080.55 1450.87,1112.05 1450.87,1116.97 1450.87,1229.17 1449.88,1230.16 1395.95,1284.09 1383.62,1284.09
NetC12_1 on Top Layer "Top Layer-No Net" (solid, remove dead copper, pour order 1013): 301.26,1438.82 469.57,1438.82 470.55,1437.83 536.5,1371.89 541.42,1371.89 541.42,1292.17 545.35,1288.23 517.8,1260.67 375.08,1260.67 365.24,1260.67 303.23,1322.68 301.26,1324.65 301.26,1438.82
NetC12_2 on Top Layer "Top Layer-No Net" (solid, remove dead copper, pour order 1014): 376.02,1230.08 467.67,1230.08 503.03,1194.72 502.05,1193.74 502.05,1057.91 413.46,1057.91 379.85,1091.53 379.85,1226.25
VCC_3V3 on Top Layer "under_gumstix" (solid, remove dead copper, pour order 1010): -110.67,915.83 2174.33,915.83 2179.33,910.83 2179.33,225.83 -105.67,225.83 -110.67,230.83 -110.67,915.83
GND on MidLayer1 "GND" (solid, remove dead copper, pour order 1006): -125.67,1729.13 -5.67,1850 -0.67,1844.96 2079.33,1844.96 2079.33,1829.86 2194.33,1714.02 2194.33,-3.34 2189.33,-3.34 2074.33,-119.17 -10.67,-119.17 -10.67,-114.14 -120.67,-3.34 -125.67,1.7 -125.67,1729.13
VCC_3V3 on MidLayer2 "VCC_3v3" (solid, remove dead copper, pour order 1005): -5.67,1845 -125.67,1723.62 -125.67,1035.67 2189.18,1035.67 2189.33,1035.83 2189.33,1728.68 2179.33,1728.68 2064.33,1845 -5.67,1845
VCC_1V8 on MidLayer2 "VCC_1V8" (solid, remove dead copper, pour order 1004): -125.67,-4.17 -5.67,-124.17 2069.33,-124.17 2189.33,-4.17 2189.33,9.96 2189.33,1140.83 2144.33,1185.83 914.33,1185.83 914.33,1220.83 699.33,1435.83 694.33,1430.83 604.33,1430.83 549.33,1430.83 259.33,1140.83 234.33,1115.83 -95.67,1115.83 -100.67,1115.83 -125.67,1090.83 -125.67,-4.17
VCC_SPI on MidLayer2 "VCC_SPI" (solid, remove dead copper, pour order 1003): 574.33,900.83 984.33,900.83 989.33,900.83 1004.33,885.83 1009.33,880.83 1009.33,805.83 1009.33,800.83 1034.33,775.83 1494.33,775.83 1499.33,775.83 1559.33,835.83 2159.33,835.83 2174.33,820.83 2189.33,805.83 2189.33,-19.17 2189.33,-34.17 2164.33,-59.17 2064.33,-59.17 2054.33,-59.17 1834.33,160.83 1834.33,505.83 1834.33,510.83 1799.33,545.83 1684.33,545.83 1624.33,545.83 1489.33,680.83 844.33,680.83 709.33,815.83 699.33,825.83 574.33,825.83 574.33,900.83
VCC_I2C on MidLayer2 "VCC_I2C" (solid, remove dead copper, pour order 1002): 1609.33,1630.6 1609.33,1618.37 1554.33,1573.52 1549.33,1569.44 1549.33,1520.52 1549.33,1516.44 1534.33,1504.21 1329.33,1504.21 1309.33,1487.9 1309.33,1467.52 1309.33,1459.37 1319.33,1451.21 1344.33,1430.83 1869.33,1430.83 1878.43,1430.83 1899.33,1447.87 1899.33,1609.97 1899.33,1610.21 1904.33,1614.29 2059.33,1614.29 2064.33,1610.21 2064.33,1565.37 2074.33,1557.21 2084.33,1549.06 2179.33,1549.06 2189.33,1557.21 2189.33,1646.9 2189.33,1650.98 2164.33,1671.37 2134.33,1695.83 1849.33,1695.83 1689.33,1695.83 1609.33,1630.6
VCC_UART on MidLayer2 "VCC_UART" (solid, remove dead copper, pour order 1001): 664.33,1355.83 644.33,1375.83 644.33,1405.83 649.33,1410.83 659.33,1420.83 659.33,1425.83 859.33,1425.83 899.33,1385.83 904.33,1380.83 1109.33,1380.83 1114.33,1380.83 1164.33,1330.83 1399.33,1330.83 1499.33,1230.83 1774.33,1230.83 1784.33,1230.83 1899.33,1345.83 1899.33,1625.83 1924.33,1650.83 2029.33,1650.83 2044.33,1635.83 2054.33,1625.83 2054.33,1265.83 2169.33,1265.83 2189.33,1245.83 2189.33,1015.83 2189.33,1010.83 2179.33,1000.83 2174.33,995.83 1974.33,995.83 1959.33,995.83 1944.33,1010.83 1944.33,1125.83 1944.33,1130.83 1929.33,1145.83 1879.33,1145.83 1864.33,1145.83 1809.33,1090.83 1799.33,1100.83 889.33,1100.83 844.33,1145.83 834.33,1155.83 834.33,1270.83 819.33,1270.83 734.33,1355.83 664.33,1355.83
VCC_IO on MidLayer2 "VCC_IO" (solid, remove dead copper, pour order 1000): 984.33,430.83 1204.33,430.83 1214.33,430.83 1319.33,325.83 1334.33,310.83 1479.33,310.83 1484.33,310.83 1529.33,265.83 1554.33,240.83 1554.33,-119.17 1104.33,-119.17 1124.33,-99.17 1124.33,285.83 1124.33,290.83 1069.33,345.83 1059.33,355.83 1004.33,355.83 994.33,355.83 974.33,375.83 969.33,380.83 969.33,410.83 969.33,415.83 984.33,430.83

## Silkscreen, mask and mechanical layers (free items; w line width, h text height)
Top Overlay:
  circle w10: c0,1724.41 r59.06
  circle w10: c0,0 r59.06
  circle w10: c1724.41,1724.41 r59.06
  circle w10: c1724.41,0 r59.06
  text "U1" at 244.33,1655.83 h60 r180
  text "3V3" at 1129.33,1655.83 h60 r180
  text "1V8" at 1319.33,1655.83 h60 r180
  text "U2" at 469.33,1650.83 h60 r180
  text "6V5" at 694.33,1650.83 h60 r180
  text "5V" at 874.33,1650.83 h60 r180
Bottom Overlay:
  text "HOST" at 249.33,55.83 h60
  text "OTG" at 709.33,50.83 h60
Mechanical 1:
  lines w10: 0,-122.05 cw(c0,0) -122.05,0 -122.05,1724.41 cw(c0,1724.41) 0,1846.46 ; 0.08,-121.97 2068.9,-121.97 ; 0.08,1846.54 2068.9,1846.54 ; 2068.9,-122.05 ccw(c2068.9,0) 2190.95,0 2190.95,1724.41 ccw(c2068.9,1724.41) 2068.9,1846.46

## Text inside footprints (layer, text, board x,y; h text height)
P1: Bottom Overlay "1" at 717.56,1670.43 h39.37 r180; Bottom Overlay "2" at 851.42,1672.4 h39.37 r180
P4: Top Overlay "2" at 2015.91,1647.91 h39.37 r90; Top Overlay "1" at 2013.94,1514.06 h39.37 r90
P5: Top Overlay "1" at 2012.95,1008.78 h39.37 r90; Top Overlay "4" at 2012.95,1234.17 h39.37 r90
P6: Bottom Overlay "4" at 2012.95,1447.48 h39.37 r90; Bottom Overlay "1" at 2012.95,1672.87 h39.37 r90
P7: Bottom Overlay "4" at 2012.95,1027.48 h39.37 r90; Bottom Overlay "1" at 2012.95,1252.87 h39.37 r90
P8: Bottom Overlay "12" at 2010.98,68.66 h39.37 r90; Bottom Overlay "1" at 2010.98,687.76 h39.37 r90
P9: Top Overlay "1" at 1145.04,54.17 h39.37; Top Overlay "6" at 1468.86,54.17 h39.37
P10: Bottom Overlay "1" at 1483.62,54.17 h39.37; Bottom Overlay "6" at 1159.8,54.17 h39.37
P12: Bottom Overlay "4" at 754.33,-24.17 h39.37; Bottom Overlay "1" at 909.33,-29.17 h39.37
P13: Bottom Overlay "4" at 294.33,-19.17 h39.37; Bottom Overlay "1" at 444.33,-24.17 h39.37